# Altium PCB PCB1.PcbDoc (part 1 of 2)
Units mm, origin at the board's own origin, x right, y up, seen from the top; angles counter-clockwise.
Board outline 100 x 100 mm, 4 copper layers (Top Layer, Layer 1, Layer 2, Bottom Layer), stack 1.55 mm thick; 115 components, 62 nets, 404 pads, 430 vias.
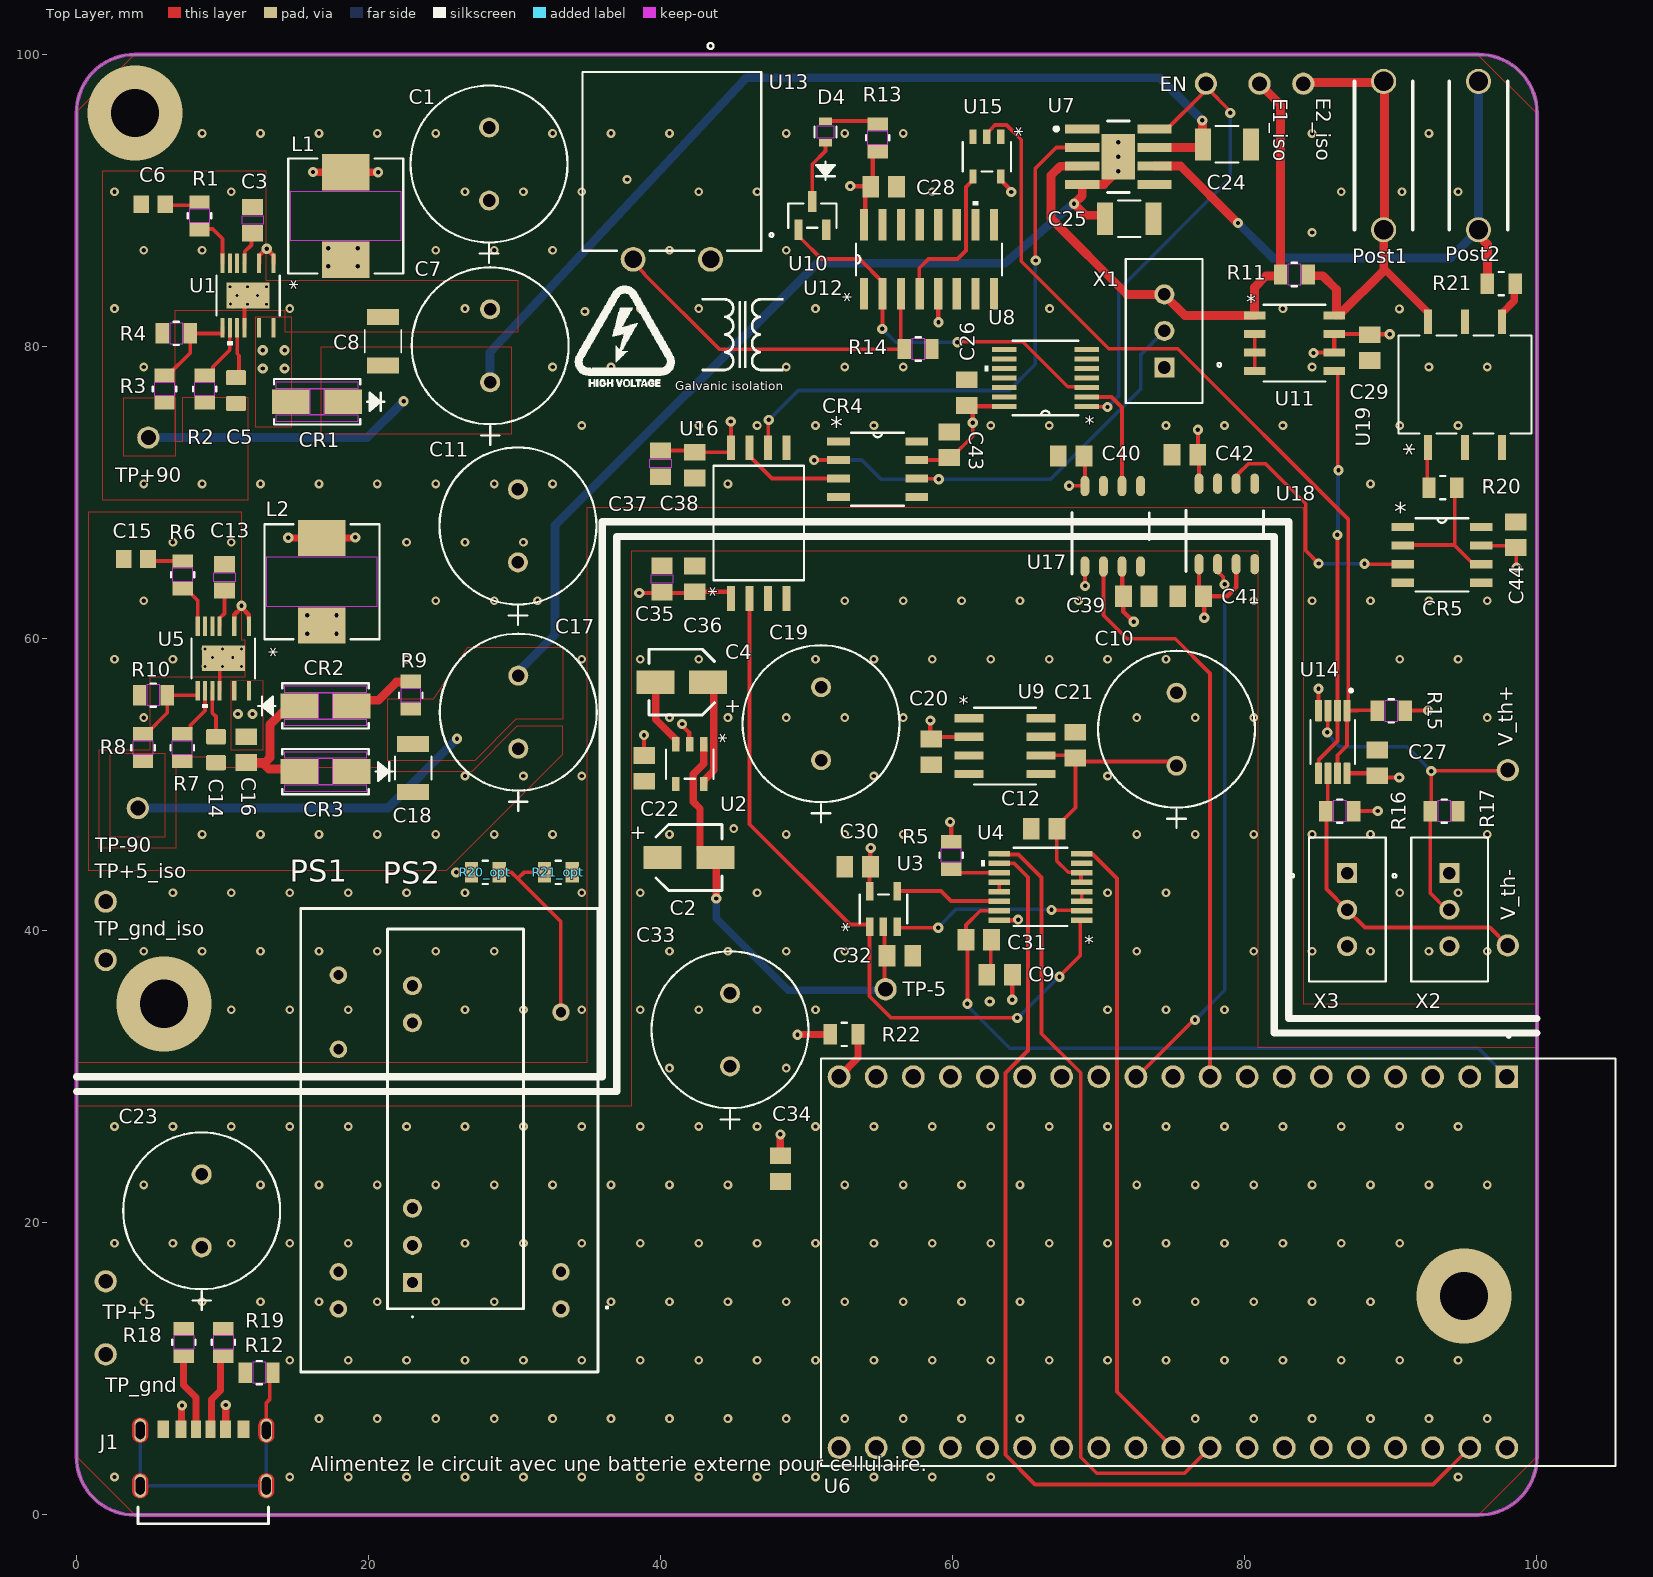
[diagram p0: Top Layer view]
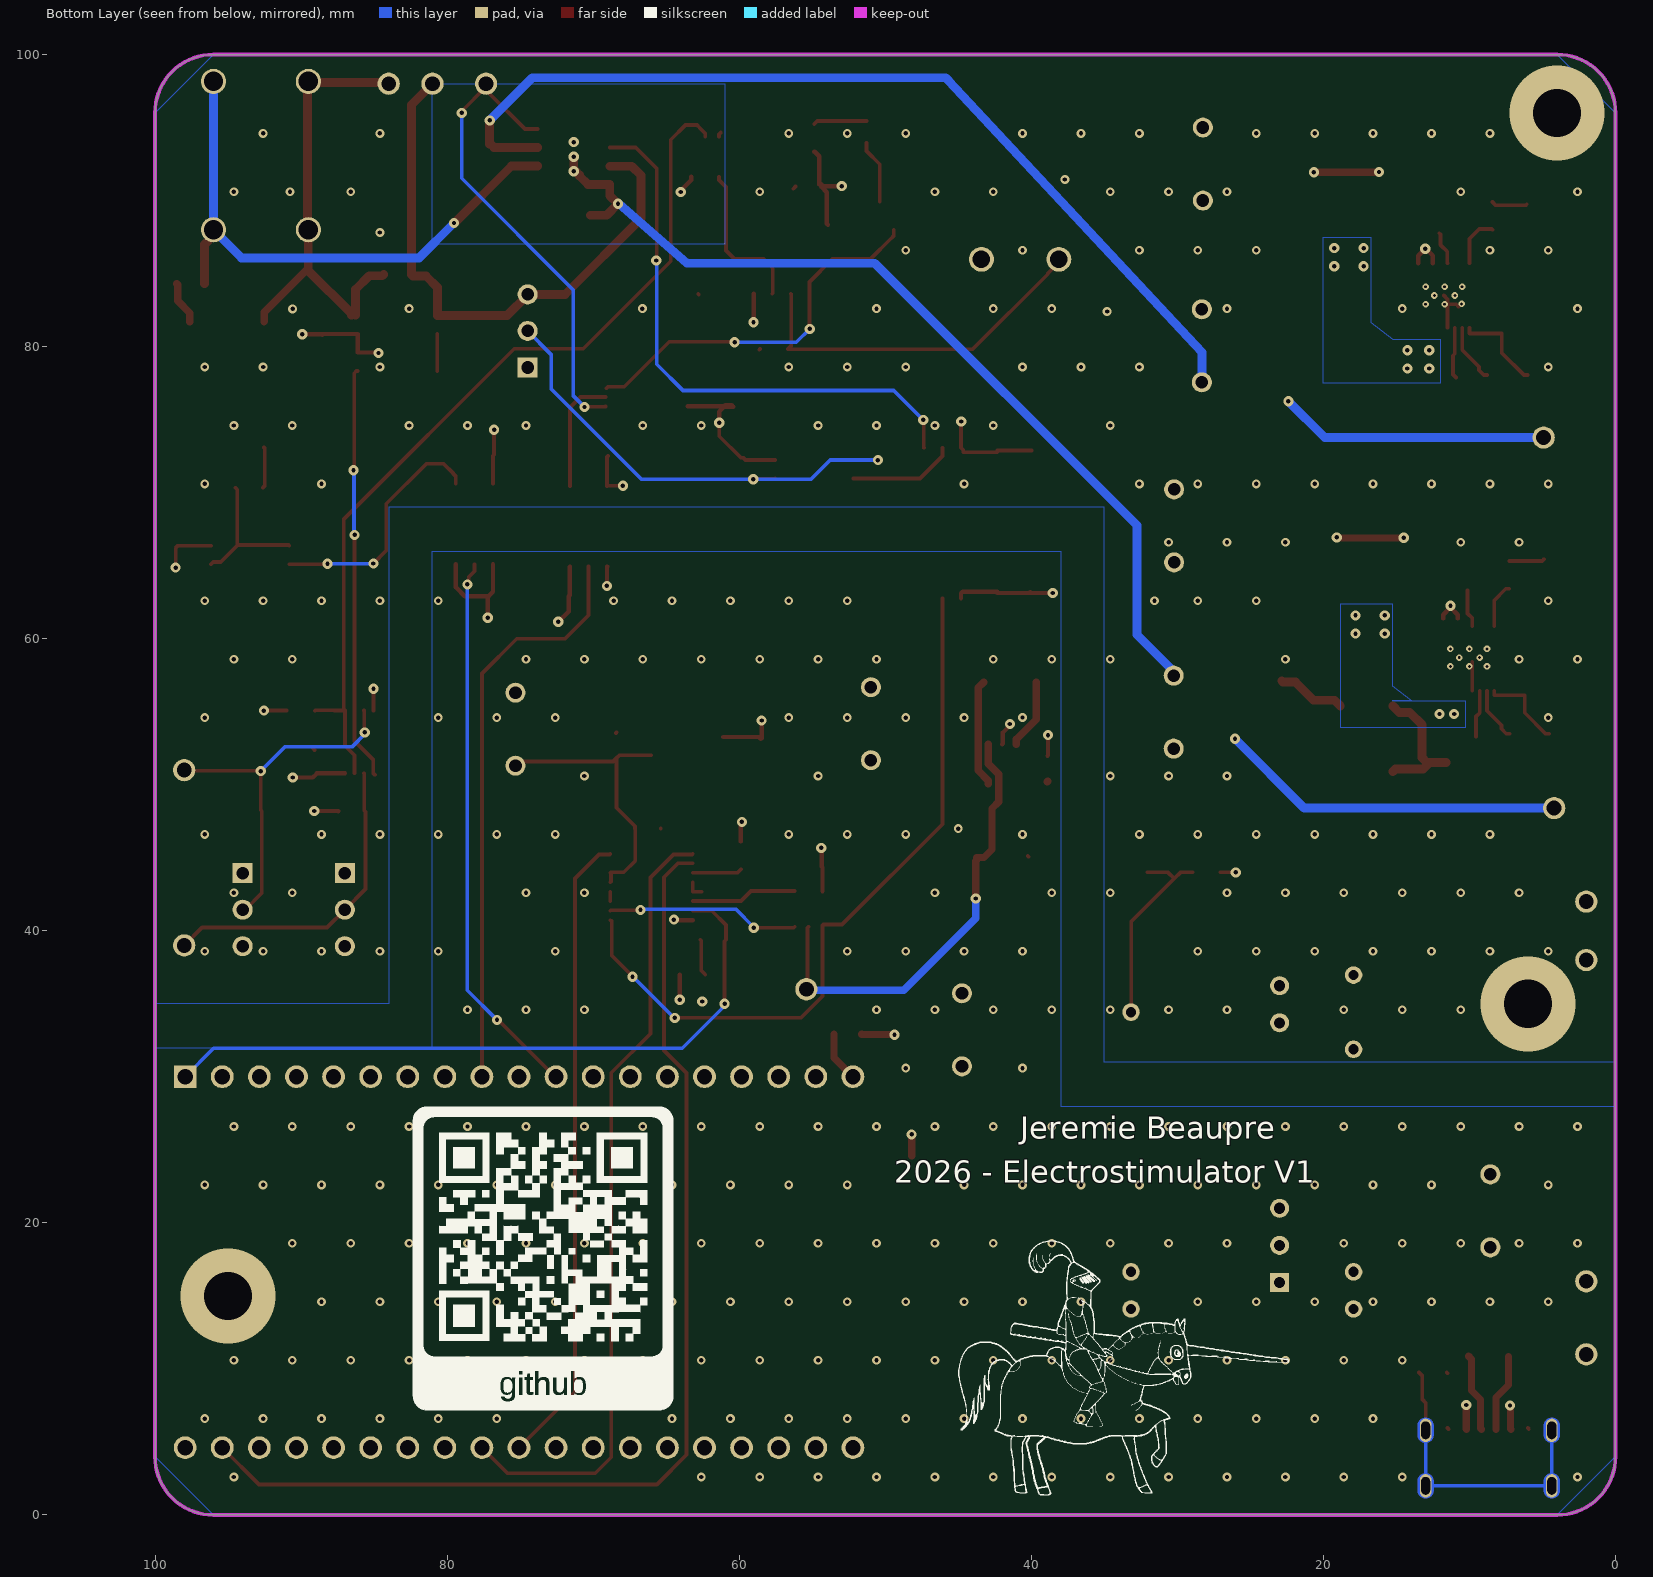
[diagram p1: Bottom Layer view, seen from below]
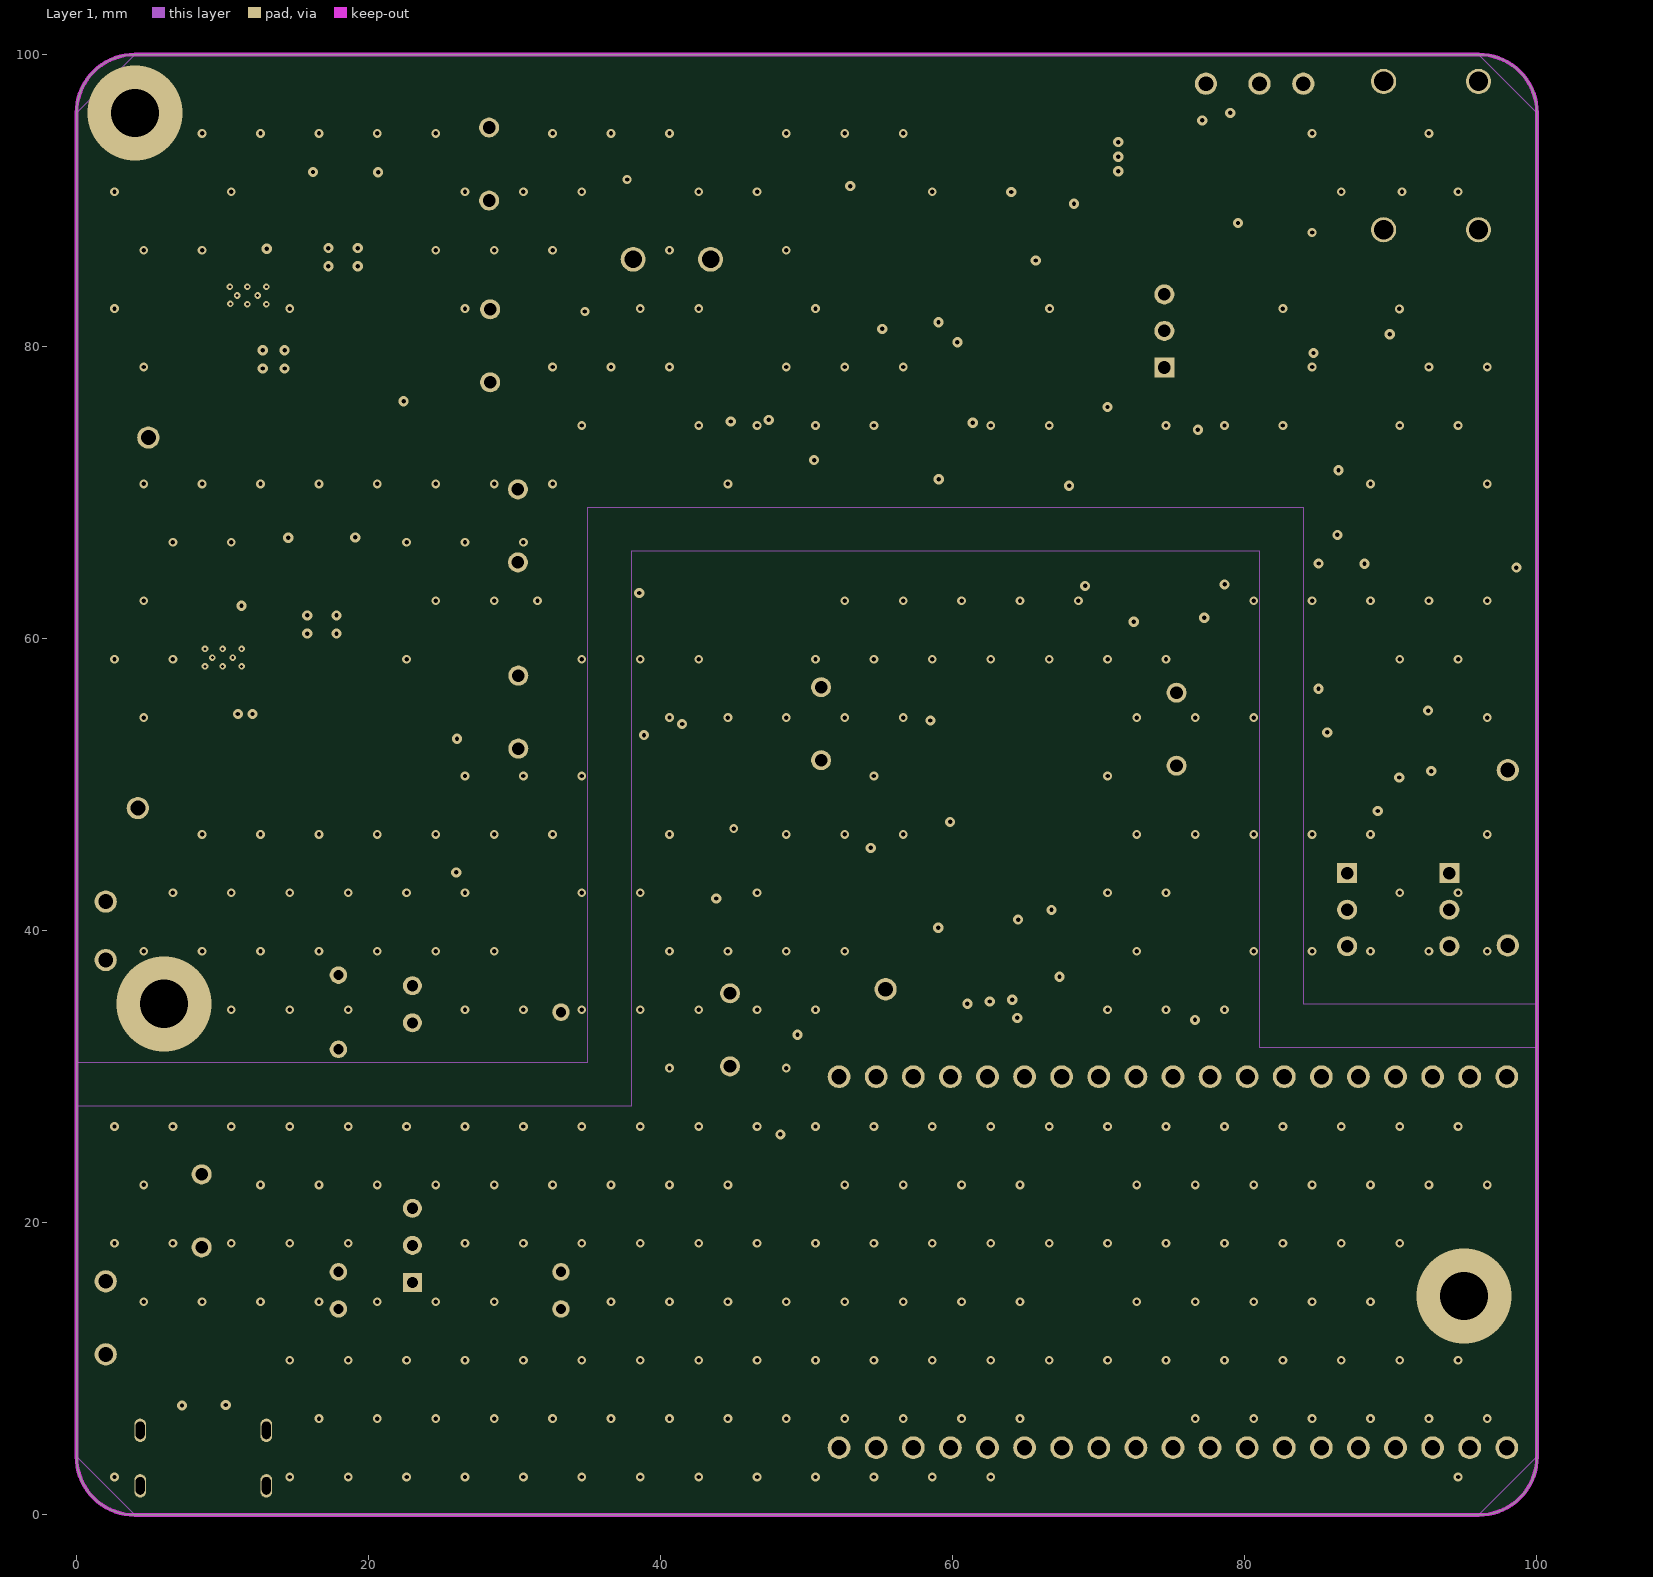
[diagram p2: Layer 1]
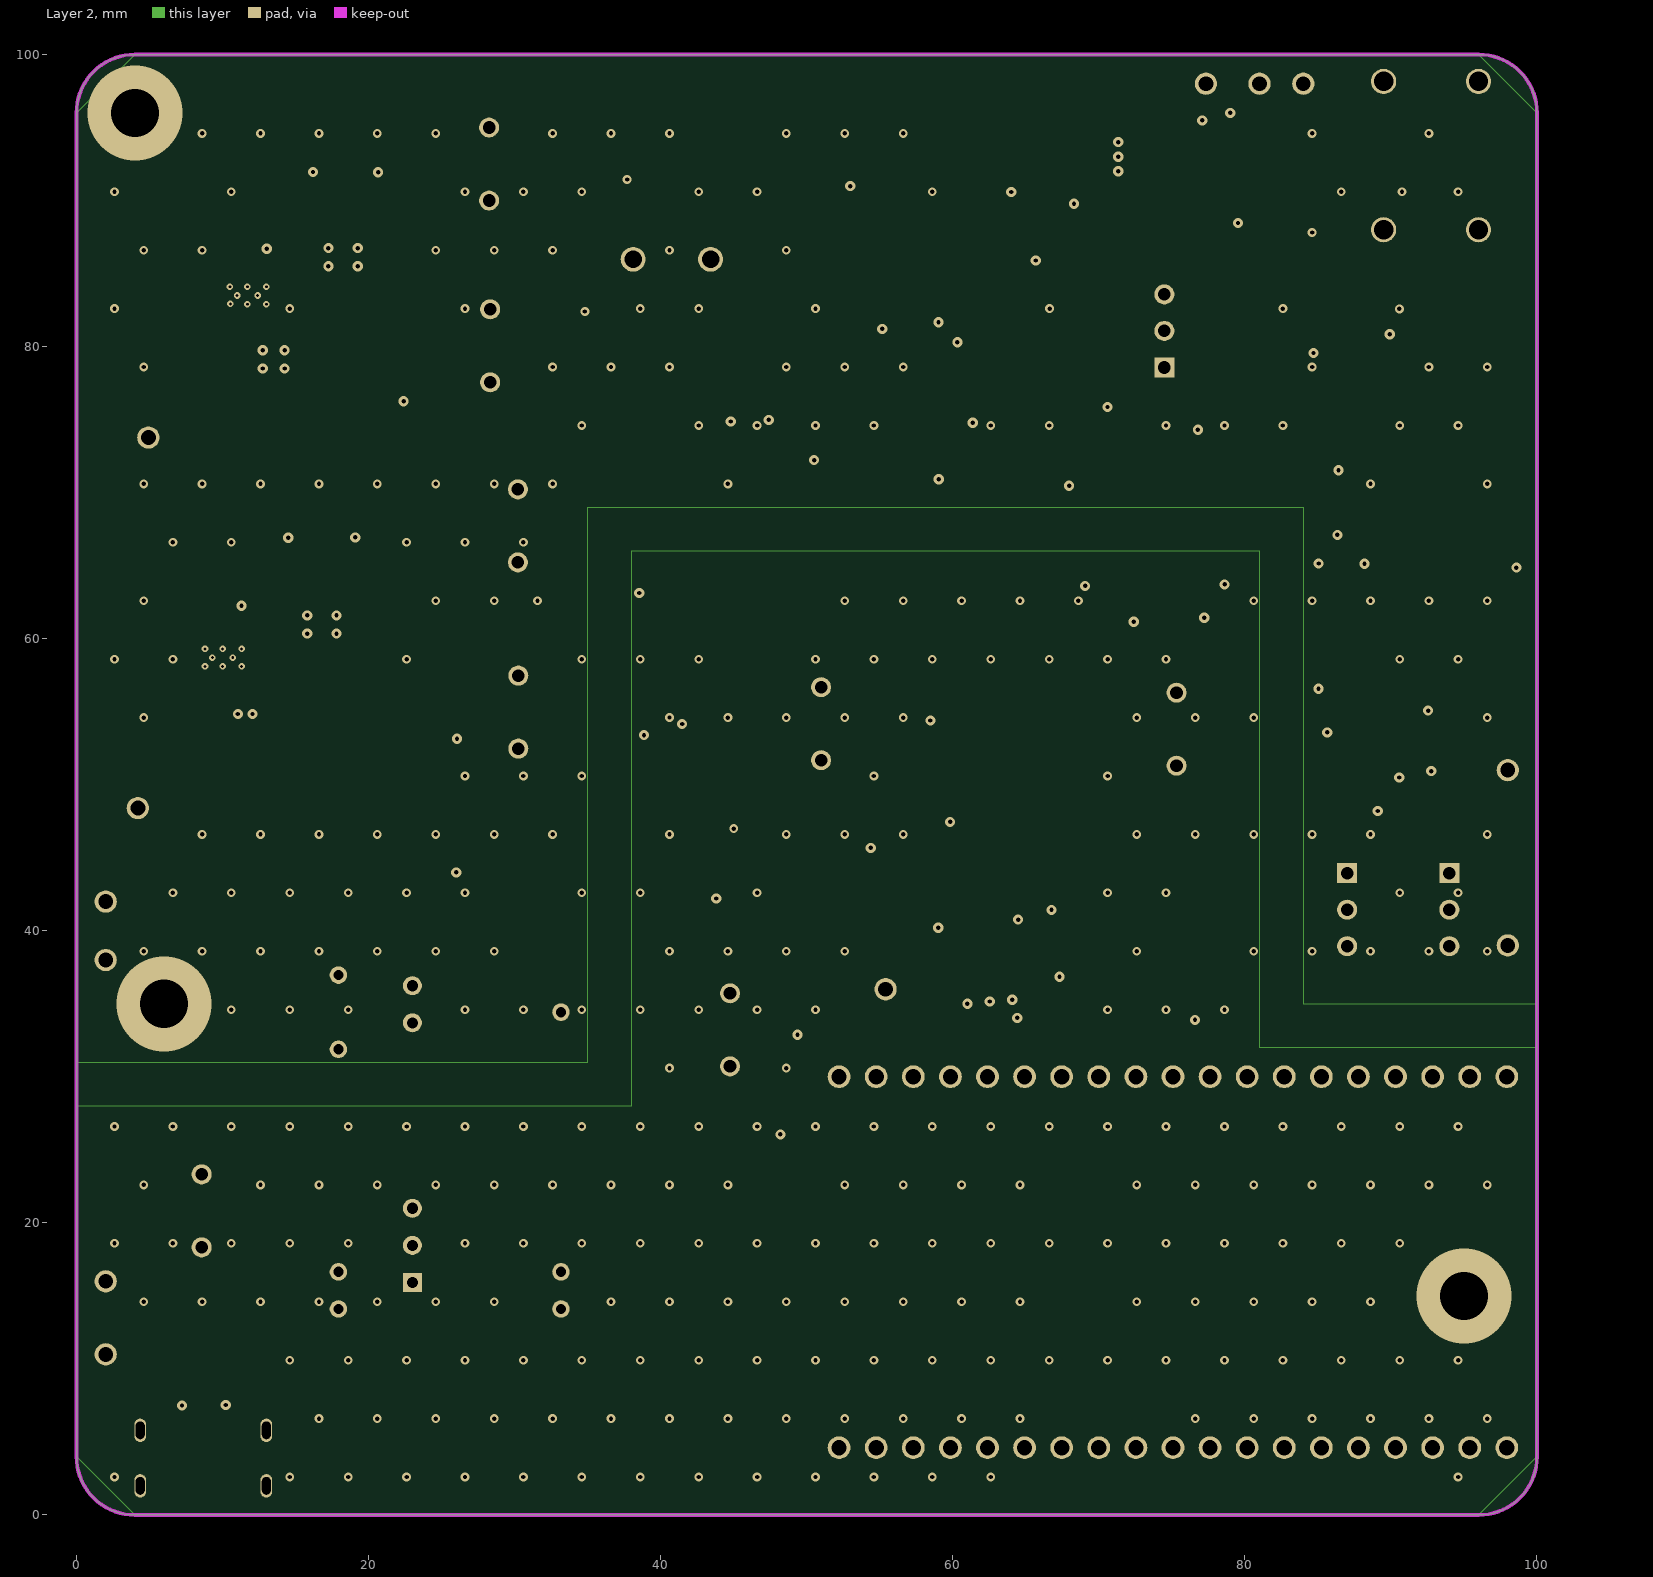
[diagram p3: Layer 2]
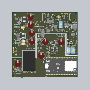
[diagram p5: 3D render of the assembled board from above, using the file's embedded part models]

## Layer stack, top to bottom
Top Solder: solder mask 0.0102, Solder Resist, Dk 3.5
Top Layer: signal copper 0.035
Dielectric 2: prepreg 0.19, PP-006, Dk 4.1
Layer 1: signal copper 0.035
Dielectric 1: core 1.03, Core-006, Dk 4.2
Layer 2: signal copper 0.035
Dielectric 3: prepreg 0.19, PP-006, Dk 4.1
Bottom Layer: signal copper 0.035
Bottom Solder: solder mask 0.0102, Solder Resist, Dk 3.5

## Board outline
0,4 0,96 cw(c4,96) 4,100 96,100 cw(c96,96) 100,96 100,4 cw(c96,4) 96,0 4,0 cw(c4,4)

## Design rules (kind name [scope] priority, off if disabled: settings)
Clearance HighVoltage [InNetClass('HighVoltage')] p1: gap=0.6 ignorepadtopadclearanceinfootprint=TRUE except(0.01: SMDPad-Region Region-Region; 0.152: Arc-Region Arc-Text Arc-Hole Track-Region Track-Text Track-Hole SMDPad-Text SMDPad-Hole THPad-Region THPad-Text THPad-Hole Via-Region Via-Text Via-Hole Fill-Region Fill-Text Fill-Hole Poly-Region Poly-Text Poly-Hole Region-Text Region-Hole Text-Text Text-Hole)
Clearance [All] p2: gap=0.2 ignorepadtopadclearanceinfootprint=TRUE except(0.01: SMDPad-Region Region-Region; 0.152: Track-Region)
HoleSize [All] p1: absolutevalues=TRUE maxlimit=6 minlimit=0.025 maxpercent=80.000 minpercent=20.000
MinimumSolderMaskSliver [All] p1: minsoldermaskwidth=0.1
PolygonConnect [All] p1: thpad.connectstyle=Relief thpad.reliefconductorwidth=0.254 thpad.reliefentries=4 thpad.polygonreliefangle="90 Angle" thpad.airgapwidth=0.254 smdpad.connectstyle=Relief smdpad.reliefconductorwidth=0.254 smdpad.reliefentries=4 smdpad.polygonreliefangle="90 Angle" smdpad.airgapwidth=0.254 via.connectstyle=Direct via.reliefconductorwidth=0.254 via.reliefentries=4 via.polygonreliefangle="90 Angle" via.airgapwidth=0.254
RoutingVias RoutingVias_small [All] p1: holewidth=0.3 width=0.7 viastyle="Through Hole" minholewidth=0.3 minwidth=0.7 maxholewidth=0.3 maxwidth=0.7
RoutingVias [All] p2: holewidth=0.711 width=6 viastyle="Through Hole" minholewidth=0.5 minwidth=0.7 maxholewidth=6 maxwidth=8
SolderMaskExpansion [All] p1: expansion=0.102 istentingtop=FALSE
SupplyNets "Schematic Supply Nets_25" [InNet('Electrode_charge_balancing')] p1: voltage=0.000
SupplyNets "Schematic Supply Nets_24" [InNet('Esp32_charge_balancing')] p2: voltage=0.000
SupplyNets "Schematic Supply Nets_23" [InNet('TRIM')] p3: voltage=0.000
SupplyNets "Schematic Supply Nets_22" [InNet('GND_iso')] p4: voltage=0.000
SupplyNets "Schematic Supply Nets_21" [InNet('+5_iso')] p5: voltage=0.000
SupplyNets "Schematic Supply Nets_20" [InNet('S1_iso-')] p6: voltage=0.000
SupplyNets "Schematic Supply Nets_19" [InNet('EN_OPA_iso')] p7: voltage=0.000
SupplyNets "Schematic Supply Nets_18" [InNet('S1_iso+')] p8: voltage=0.000
SupplyNets "Schematic Supply Nets_17" [InNet('S1')] p9: voltage=0.000
SupplyNets "Schematic Supply Nets_16" [InNet('-5')] p10: voltage=0.000
SupplyNets "Schematic Supply Nets_15" [InNet('Electrode -')] p11: voltage=0.000
SupplyNets "Schematic Supply Nets_14" [InNet('EN_OPA2')] p12: voltage=0.000
SupplyNets "Schematic Supply Nets_13" [InNet('+5')] p13: voltage=0.000
SupplyNets "Schematic Supply Nets_12" [InNet('+90')] p14: voltage=0.000
SupplyNets "Schematic Supply Nets_11" [InNet('DIN')] p15: voltage=0.000
SupplyNets "Schematic Supply Nets_10" [InNet('+2.5')] p16: voltage=0.000
SupplyNets "Schematic Supply Nets_9" [InNet('V_th+')] p17: voltage=0.000
SupplyNets "Schematic Supply Nets_8" [InNet('CS')] p18: voltage=0.000
SupplyNets "Schematic Supply Nets_7" [InNet('+3.3')] p19: voltage=0.000
SupplyNets "Schematic Supply Nets_6" [InNet('Electrode +')] p20: voltage=0.000
SupplyNets "Schematic Supply Nets_5" [InNet('GND')] p21: voltage=0.000
SupplyNets "Schematic Supply Nets_4" [InNet('V_th-')] p22: voltage=0.000
SupplyNets "Schematic Supply Nets_3" [InNet('INV')] p23: voltage=0.000
SupplyNets "Schematic Supply Nets_2" [InNet('EN_OPA')] p24: voltage=0.000
SupplyNets "Schematic Supply Nets_1" [InNet('CLK')] p25: voltage=0.000
SupplyNets "Schematic Supply Nets" [InNet('-90')] p26: voltage=0.000
Width Power [InNet('+5')] p1: maxlimit=0.6 minlimit=0.3 preferedwidth=0.3 midlayer1_maxwidth=0.3 midlayer2_maxwidth=0.3 bottomlayer_maxwidth=0.3 minimp=50.000000 maximp=50.000000 favimp=50.000000
Width [All] p2: maxlimit=0.6 minlimit=0.2 preferedwidth=0.254
28 further rules are at their usual default settings.

## Classes and differential pairs
component class Isolation: C35 C36 C37 C38 C39 C40 C41 C42 C43 C44 CR4 CR5 U16 U17 U18
net class HighVoltage: +90 -90 "Electrode +" "Electrode -" NetC16_1 NetC16_2 NetCR1_2 NetCR2_2 NetE2_iso_1
component class Current_check: C27 C28 C29 D4 E1_iso E2_iso Post1 Post2 R11 R13 R14 R15 R16 R17 R20 R21 U10 U11 U12 U13 U14 U15 U19 V_th+ V_th- X2 X3
component class Main: C1 C2 C3 C4 C5 C6 C7 C8 C9 C10 C11 C12 C13 C14 C15 C16 C17 C18 C19 C20 C21 C22 C23 C24 C25 C26 C30 C31 C32 C33 C34 CR1 CR2 CR3 EN J1 L1 L2 PS1 PS2 R1 R2 R3 R4 R5 R6 R7 R8 R9 R10 R12 R18 R19 R20_opt R21_opt R22 TP+5 TP+5_iso TP+90 TP-5 TP-90 TP_gnd TP_gnd_iso U1 U2 U3 U4 U5 U6 U7 U8 U9 X1

## Components (designator, comment, footprint, x,y, rotation, side; value= is the part's Value field where it differs from the comment)
C1 "10u" CAP_BX_10x20_RUB 28.25,90 r90 top
C2 "WCAP-ASLL_4X5.5" WCAP-ASLL_4X5.5(DXL) 41.936,45.02 r180 top
C3 "Capacitor" 0805_AVX 12.062,88.658 r90 top value=1u
C4 "WCAP-ASLL_4X5.5" WCAP-ASLL_4X5.5(DXL) 41.447,57.028 r0 top
C5 "Capacitor" CAPC2012X75N 10.922,76.992 r90 top value=2n
C6 "Capacitor" CC0805N_YAG 5.25,89.75 r0 top value=1n
C7 "10u" CAP_BX_10x20_RUB 28.324,77.556 r90 top
C8 "Capacitor" CAP_C3225X7R2E224K200AA 20.983,80.366 r270 top value=0.22u
C9 "Capacitor" CAPC2012X150N 63.2,37 r0 top value=0.1u
C10 "10u" CAP_BX_10x20_RUB 75.318,51.302 r90 top
C11 "10u" CAP_BX_10x20_RUB 30.225,65.223 r90 top
C12 "Capacitor" CAPC2012X150N 66.25,47 r0 top value=0.1u
C13 "Capacitor" 0805_AVX 10.13,64.207 r90 top value=1u
C14 "Capacitor" CAPC2012X75N 9.55,52.4 r90 top value=2n
C15 "Capacitor" CC0805N_YAG 4.068,65.449 r0 top value=1n
C16 "Capacitor" CAPC2012X150N 11.607,52.406 r90 top value=0.1u
C17 "10u" CAP_BX_10x20_RUB 30.25,52.473 r90 top
C18 "Capacitor" CAP_C3225X7R2E224K200AA 23.05,51.15 r90 top value=0.22u
C19 "10u" CAP_BX_10x20_RUB 50.98,51.679 r90 top
C20 "Capacitor" CAPC2012X150N 58.523,52.252 r90 top value=0.1u
C21 "Capacitor" CAPC2012X150N 68.397,52.711 r270 top value=0.1u
C22 "Capacitor" CAPC2012X150N 38.887,51.118 r270 top value=0.1u
C23 "10u" CAP_BX_10x20_RUB 8.571,18.325 r90 top
C24 "Capacitor" CAP_C3225X7R2E224K200AA 78.77,93.849 r180 top value=0.22u
C25 "Capacitor" CAP_C3225X7R2E224K200AA 72.082,88.75 r0 top value=0.22u
C26 "Capacitor" CAPC2012X150N 60.968,76.856 r90 top value=0.1u
C27 "Capacitor" CAPC2012X150N 89.074,51.498 r270 top value=0.1u
C28 "Capacitor" CAPC2012X150N 55.262,90.958 r180 top value=0.1u
C29 "Capacitor" CAPC2012X150N 88.558,79.925 r90 top value=0.1u
C30 "Capacitor" CAPC2012X150N 53.48,44.4 r0 top value=0.1u
C31 "Capacitor" CAPC2012X150N 61.779,39.383 r180 top value=0.1u
C32 "Capacitor" CAPC2012X150N 56.38,38.3 r180 top value=0.1u
C33 "10u" CAP_BX_10x20_RUB 44.748,30.721 r90 top
C34 "Capacitor" CAPC2012X150N 48.203,23.716 r90 top value=0.1u
C35 "Capacitor" 0805_AVX 40.085,64.089 r270 top value=1u
C36 "Capacitor" CAPC2012X150N 42.332,64.089 r90 top value=0.1u
C37 "Capacitor" 0805_AVX 39.985,71.988 r270 top value=1u
C38 "Capacitor" CAPC2012X150N 42.332,71.892 r90 top value=0.1u
C39 "Capacitor" CAPC2012X150N 72.559,62.909 r180 top value=0.1u
C40 "Capacitor" CAPC2012X150N 68.099,72.51 r0 top value=0.1u
C41 "Capacitor" CAPC2012X150N 76.28,62.909 r0 top value=0.1u
C42 "Capacitor" CAPC2012X150N 75.888,72.599 r0 top value=0.1u
C43 "Capacitor" CAPC2012X150N 59.741,73.278 r270 top value=0.1u
C44 "Capacitor" CAPC2012X150N 98.556,67.115 r270 top value=0.1u
CR1 "SK220ATR" DIODE_SK220ATR_SMC-M 16.473,76.224 r180 top
CR2 "SK220ATR" DIODE_SK220ATR_SMC-M 17.05,55.4 r0 top
CR3 "SK220ATR" DIODE_SK220ATR_SMC-M 17.05,50.9 r180 top
CR4 "TS461CDT" SO-8_STM 54.856,71.599 r0 top
CR5 "TS461CDT" SO-8_STM 93.492,65.738 r0 top
D4 "SML-M13UTT86" LED_SML-M13DT_ROM 51.281,94.694 r90 top
E1_iso "Testpoint_1" Testpoint1 81,98 r0 top
E2_iso "Testpoint_1" Testpoint1 84,98 r0 top
EN "Testpoint_1" Testpoint1 77.332,98 r0 top
J1 "USB4125-GF-A_REVA2" GCT_USB4125-GF-A_REVA2 8.68,2.8 r0 top
L1 "Inductor" DR73 18.44,88.946 r270 top value=10u
L2 "Inductor" DR73 16.8,63.9 r270 top value=10u
Post1 "J110-ND" J110-ND 89.5,88 r90 top
Post2 "J110-ND" J110-ND 96,88 r90 top
PS1 "JHM1005S05" JHM1005S05 33.173,14.108 r270 top
PS2 "IMM0505S05" IMM0505S05 23,15.92 r90 top
R1 "Resistor" RESISTOR_0805-M 8.422,88.946 r270 top value=84.5K
R2 "Resistor" RESISTOR_0805-M 8.774,77.097 r90 top value=107K
R3 "Resistor" RESISTOR_0805-M 6.028,77.097 r270 top value=1MEG
R4 "Resistor" RESISTOR_0805-M 6.829,80.903 r180 top value=18.1K
R5 "Resistor" RESISTOR_0805-M 59.884,45.16 r270 top value=10k
R6 "Resistor" RESISTOR_0805-M 7.267,64.368 r270 top value=84.5K
R7 "Resistor" RESISTOR_0805-M 7.236,52.546 r90 top value=107K
R8 "1MEG" RESISTOR_0805-M 4.551,52.546 r90 top
R9 "Resistor" RESISTOR_0805-M 22.885,56.135 r270 top value=20
R10 "Resistor" RESISTOR_0805-M 5.267,56.135 r180 top value=8.96k
R11 "Resistor" RESISTOR_0805-M 83.391,84.939 r0 top value=1
R12 "Resistor" RESISTOR_0805-M 12.5,9.75 r180 top value=1MEG
R13 "Resistor" RESISTOR_0805-M 54.856,94.288 r270 top value=350
R14 "Resistor" RESISTOR_0805-M 57.625,79.834 r0 top value=10K
R15 "Resistor" RESISTOR_0805-M 90.022,55.059 r0 top value=10K
R16 "Resistor" RESISTOR_0805-M 86.5,48.195 r0 top value=1K
R17 "Resistor" RESISTOR_0805-M 93.64,48.195 r180 top value=1K
R18 "Resistor" RESISTOR_0805-M 7.355,11.815 r270 top value=5.1k
R19 "Resistor" RESISTOR_0805-M 10.058,11.815 r270 top value=5.1k
R20 "Resistor" Resistor_0805-M 93.559,70.345 r0 top value=680
R20_opt "Resistor" Resistor_0805-M 28,44 r0 top value=2k
R21 "Resistor" Resistor_0805-M 97.558,84.313 r0 top value=1
R21_opt "Resistor" Resistor_0805-M 33,44 r0 top value=2k
R22 "Resistor" Resistor_0805-M 52.559,32.91 r180 top value=0
TP+5 "Testpoint_1" Testpoint1 2,16 r90 top
TP+5_iso "Testpoint_1" Testpoint1 2,42 r90 top
TP+90 "Testpoint_1" Testpoint1 4.921,73.772 r0 top
TP-5 "Testpoint_1" Testpoint1 55.4,36 r270 top
TP-90 "Testpoint_1" Testpoint1 4.2,48.4 r90 top
TP_gnd "Testpoint_1" Testpoint1 2,11 r90 top
TP_gnd_iso "Testpoint_1" Testpoint1 2,38 r90 top
U1 "LT8365HMSE#PBF" 05-08-1871_ADI 11.75,83.5 r270 top
U2 "MAX870EUK+T" 21-0057F_MXM 41.988,51.415 r270 top
U3 "AD8628ARTZ-REEL7" RJ_5_ADI 55.25,41.5 r90 top
U4 "AD5542ABRUZ" RU_16_ADI 66,43 r180 top
U5 "LT8365HMSE#PBF" 05-08-1871_ADI 10.05,58.65 r270 top
U6 "ESP32-DEVKITC-32UE" ESPRESSIF_ESP32-DEVKITC-32UE 75.075,17.308 r270 top
U7 "OPA462IDDA" DDA0008J-IPC_A 71.332,93 r0 top
U8 "SN74HC02PWR" PW14 66.34,77.853 r180 top
U9 "ADR421ARZ" R_8_ADI 63.578,52.646 r0 top
U10 "2N7002KT1G" SOT-23_ONS 50.38,88.965 r0 top
U11 "INA240A1DR" D8_TEX 83.391,80.231 r0 top
U12 "CD4043BDR" D16 58.368,85.979 r90 top
U13 "GPTS203211B" SWITCH_03211B 43.414,85.979 r270 top
U14 "TLV1702AIDGKR" SOP65P490X110-8N 86.015,52.928 r270 top
U15 "SN74AHC1G04DBVR" DBV5 62.332,93 r270 top
U16 "AMC1350QDWVRQ1" AMC1350QDWVRQ1_TEX 46.717,67.92 r90 top
U17 "ISO7710FDR" D0008B_N 70.95,67.697 r90 top
U18 "ISO7710FDR" D0008B_N 78.763,67.861 r90 top
U19 "AQV217AZ" DIP-6_SMD_PAN 95.073,77.399 r90 top
V_th+ "Testpoint_1" Testpoint1 98,51 r270 top
V_th- "Testpoint_1" Testpoint1 98,39 r270 top
X1 "PV36W102C01B00" POT_PV36W_MUR 74.485,78.572 r90 top
X2 "PV36W102C01B00" POT_PV36W_MUR 94,43.945 r270 top
X3 "PV36W102C01B00" POT_PV36W_MUR 87,43.945 r270 top

## Footprints (in the part's own frame and the unit in brackets; to place one, negate y for a bottom-side part, rotate by r counter-clockwise, add the part's x,y. Pads: shape width x height; smd on the part's side, far side on the other; paste and mask are expansions set on the pad)
05-08-1871_ADI [mil]
  rect 52.5x11 smd paste+0 mask+0: 1(-87.25,68.9) 3(-87.25,29.53) 5(-87.25,-9.84) 6(-87.25,-29.53) 7(-87.25,-49.21) 8(-87.25,-68.9) 9(87.25,-68.9) 10(87.25,-49.21) 11(87.25,-29.53) 12(87.25,-9.84) 14(87.25,29.53) 16(87.25,68.9)
  rect 69x116 smd paste-57.5 mask+0: 17(0,0)
  silkscreen extent -54,-86 134,86, body extent -99,-81 99,81, height 43
21-0057F_MXM [mil]
  rect 38.5x20 smd paste+0 mask+0: 1(-53.75,37.4) 2(-53.75,0) 3(-53.75,-37.4) 4(53.75,-37.4) 5(53.75,37.4)
  silkscreen extent -40,-64 40,64, body extent -59,-59 59,59, height 57
0805_AVX [mil]
  rect 44x57 smd paste+0 mask+0: 1(-35.5,0) 2(35.5,0)
  Top Layer keep-out region: -11.5,-28.5 -11.5,28.5 11.5,28.5 11.5,-28.5
  body extent -44,-29 44,29, height 37
AMC1350QDWVRQ1_TEX [mil]
  rect 67x22 smd paste+0 mask+0: 1(-203,75) 2(-203,25) 3(-203,-25) 4(-203,-75) 5(203,-75) 6(203,-25) 7(203,25) 8(203,75)
  silkscreen extent -154,-122 154,122, body extent -223,-117 223,117, height 110
CAP_BX_10x20_RUB [mil]
  round 54 hole 34 paste-99999 mask+0: 1(0,0) 2(196.85,0)
  silkscreen extent -168,-212 310,212, body extent -108,-206 306,206, height 867
CAP_C3225X7R2E224K200AA [mm]
  rect 1.1x2.2 smd: 1(-1.65,0) 2(1.65,0)
  silkscreen extent -0.78,-1.25 0.78,1.25, body extent -1.6,-1.25 1.6,1.25, height 2.2
CAPC2012X75N [mm]
  rrect25% 1.05x1.38 smd: 1(-0.888,0) 2(0.888,0)
CAPC2012X150N [mm]
  rect 1.15x1.47 smd: 1(-0.88,0) 2(0.88,0)
  body extent -1,-0.63 1,0.63, height 1.5
CC0805N_YAG [mil]
  rect 42x48 smd paste+0 mask+0: 1(-32.5,0) 2(32.5,0)
  body extent -39,-24 39,24, height 28
D8_TEX [mm]
  rect 1.455x0.558 smd paste+0 mask+0: 1(-2.721,1.905) 2(-2.721,0.635) 3(-2.721,-0.635) 4(-2.721,-1.905) 5(2.721,-1.905) 6(2.721,-0.635) 7(2.721,0.635) 8(2.721,1.905)
  silkscreen extent -2.12,-2.63 2.12,2.63, body extent -3.1,-2.5 3.1,2.5, height 1.76
D0008B_N [mil]
  oval 55x23.62 smd paste+0 mask+2: 1(-108.5,75) 2(-108.5,25) 3(-108.5,-25) 4(-108.5,-75) 5(108.5,-75) 6(108.5,-25) 7(108.5,25) 8(108.5,75)
  silkscreen extent -129,-98 37,110
D16 [mil]
  rect 86x22 smd paste-43 mask-43: 1(-93,175) 2(-93,125) 3(-93,75) 4(-93,25) 5(-93,-25) 6(-93,-75) 7(-93,-125) 8(-93,-175) 9(93,-175) 10(93,-125) 11(93,-75) 12(93,-25) 13(93,25) 14(93,75) 15(93,125) 16(93,175)
  silkscreen extent -43,-197 156,197, body extent -122,-197 122,197, height 69
DBV5 [mil]
  rect 38.28x20 smd paste+0 mask+0: 1(-53.64,37.4) 2(-53.64,0) 3(-53.64,-37.4) 4(53.64,-37.4) 5(53.64,37.4)
  silkscreen extent -40,-65 40,65, body extent -59,-60 59,60, height 57
DDA0008J-IPC_A [mm]
  rect 2.353x0.622 smd paste+0 mask+0: 1(-2.477,1.905) 2(-2.477,0.635) 3(-2.477,-0.635) 4(-2.477,-1.905) 5(2.477,-1.905) 6(2.477,-0.635) 7(2.477,0.635) 8(2.477,1.905)
  rect 2.3x3.1 smd paste-1.537 mask+0: 9(0,0)
  silkscreen extent -4.37,-2.45 0.75,2.45
DIODE_SK220ATR_SMC-M [mil]
  rect 101x67 smd paste+0 mask+0: 1(-71,0) 2(71,0)
  Top Layer keep-out region: -18.5,-35.5 -18.5,35.5 18.5,35.5 18.5,-35.5
  Top Layer keep-out region: -109.5,35.5 -109.5,54 109.5,54 109.5,35.5
  Top Layer keep-out region: -109.5,-54 -109.5,-35.5 109.5,-35.5 109.5,-54
  silkscreen extent -182,-61 117,61, body extent -111,-56 111,56, height 118
DIP-6_SMD_PAN [mil]
  rect 67x21 smd paste+0 mask+0: 1(-169.5,100) 2(-169.5,0) 3(-169.5,-100) 4(169.5,-100) 5(169.5,0) 6(169.5,100)
  silkscreen extent -132,-179 132,179, body extent -189,-174 189,174, height 150
DR73 [mil]
  rect 98x128 smd paste+0 mask+0: 1(-118,0) 2(118,0)
  Top Layer keep-out region: -67,-148 -67,148 67,148 67,-148
  silkscreen extent -155,-155 155,155, body extent -150,-150 150,150, height 140
ESPRESSIF_ESP32-DEVKITC-32UE [mm]
  rect 1.56x1.56 / inner round 1.56 / far side rect 1.56x1.56 hole 1.04: 1(-12.7,22.86)
  round 1.56 hole 1.04: 2(-12.7,20.32) 3(-12.7,17.78) 4(-12.7,15.24) 5(-12.7,12.7) 6(-12.7,10.16) 7(-12.7,7.62) 8(-12.7,5.08) 9(-12.7,2.54) 10(-12.7,0) 11(-12.7,-2.54) 12(-12.7,-5.08) 13(-12.7,-7.62) 14(-12.7,-10.16) 15(-12.7,-12.7) 16(-12.7,-15.24) 17(-12.7,-17.78) 18(-12.7,-20.32) 19(-12.7,-22.86) 20(12.7,22.86) 21(12.7,20.32) 22(12.7,17.78) 23(12.7,15.24) 24(12.7,12.7) 25(12.7,10.16) 26(12.7,7.62) 27(12.7,5.08) 28(12.7,2.54) 29(12.7,0) 30(12.7,-2.54) 31(12.7,-5.08) 32(12.7,-7.62) 33(12.7,-10.16) 34(12.7,-12.7) 35(12.7,-15.24) 36(12.7,-17.78) 37(12.7,-20.32) 38(12.7,-22.86)
  silkscreen extent -15.6,-24.1 13.95,30.3, body extent -13.95,-24.62 13.95,24.13, height 7.85
GCT_USB4125-GF-A_REVA2 [mm]
  rect 0.7x1.2 smd: A5(-0.5,3.08) B5(0.5,3.08)
  rect 0.76x1.2 smd: A9(1.52,3.08) B9(-1.52,3.08)
  rect 0.8x1.2 smd: A12(2.75,3.08) B12(-2.75,3.08)
  oval 0.8x1.6 hole 0.6 slot 1.2 at 90 deg mask+0: S1(-4.32,3) S2(4.32,3) S3(-4.32,-0.8) S4(4.32,-0.8)
  Top Layer region: 4.349,0.049 4.377,0.047 4.406,0.043 4.434,0.038 4.462,0.031 4.49,0.023 4.517,0.013 4.544,0.002 4.57,-0.01 4.595,-0.024 4.62,-0.039 4.643,-0.055 4.666,-0.073 4.688,-0.091 4.709,-0.111 4.729,-0.132 4.747,-0.154 4.765,-0.177 4.781,-0.2 4.796,-0.225 4.81,-0.25 4.822,-0.276 4.833,-0.303 4.843,-0.33 4.851,-0.358 4.858,-0.386 4.863,-0.414 4.867,-0.443 4.869,-0.471 4.87,-0.5 4.87,-1.1 4.869,-1.129 4.867,-1.157 4.863,-1.186 4.858,-1.214 4.851,-1.242 4.843,-1.27 4.833,-1.297 4.822,-1.324 4.81,-1.35 4.796,-1.375 4.781,-1.4 4.765,-1.423 4.747,-1.446 4.729,-1.468 4.709,-1.489 4.688,-1.509 4.666,-1.527 4.643,-1.545 4.62,-1.561 4.595,-1.576 4.57,-1.59 4.544,-1.602 4.517,-1.613 4.49,-1.623 4.462,-1.631 4.434,-1.638 4.406,-1.643 4.377,-1.647 4.349,-1.649 4.32,-1.65 4.291,-1.649 4.263,-1.647 4.234,-1.643 4.206,-1.638 4.178,-1.631 4.15,-1.623 4.123,-1.613 4.096,-1.602 4.07,-1.59 4.045,-1.576 4.02,-1.561 3.997,-1.545 3.974,-1.527 3.952,-1.509 3.931,-1.489 3.911,-1.468 3.893,-1.446 3.875,-1.423 3.859,-1.4 3.844,-1.375 3.83,-1.35 3.818,-1.324 3.807,-1.297 3.797,-1.27 3.789,-1.242 3.782,-1.214 3.777,-1.186 3.773,-1.157 3.771,-1.129 3.77,-1.1 3.77,-0.5 3.771,-0.471 3.773,-0.443 3.777,-0.414 3.782,-0.386 3.789,-0.358 3.797,-0.33 3.807,-0.303 3.818,-0.276 3.83,-0.25 3.844,-0.225 3.859,-0.2 3.875,-0.177 3.893,-0.154 3.911,-0.132 3.931,-0.111 3.952,-0.091 3.974,-0.073 3.997,-0.055 4.02,-0.039 4.045,-0.024 4.07,-0.01 4.096,0.002 4.123,0.013 4.15,0.023 4.178,0.031 4.206,0.038 4.234,0.043 4.263,0.047 4.291,0.049 4.32,0.05
  Top Layer region: 4.349,3.849 4.377,3.847 4.406,3.843 4.434,3.838 4.462,3.831 4.49,3.823 4.517,3.813 4.544,3.802 4.57,3.79 4.595,3.776 4.62,3.761 4.643,3.745 4.666,3.727 4.688,3.709 4.709,3.689 4.729,3.668 4.747,3.646 4.765,3.623 4.781,3.6 4.796,3.575 4.81,3.55 4.822,3.524 4.833,3.497 4.843,3.47 4.851,3.442 4.858,3.414 4.863,3.386 4.867,3.357 4.869,3.329 4.87,3.3 4.87,2.7 4.869,2.671 4.867,2.643 4.863,2.614 4.858,2.586 4.851,2.558 4.843,2.53 4.833,2.503 4.822,2.476 4.81,2.45 4.796,2.425 4.781,2.4 4.765,2.377 4.747,2.354 4.729,2.332 4.709,2.311 4.688,2.291 4.666,2.273 4.643,2.255 4.62,2.239 4.595,2.224 4.57,2.21 4.544,2.198 4.517,2.187 4.49,2.177 4.462,2.169 4.434,2.162 4.406,2.157 4.377,2.153 4.349,2.151 4.32,2.15 4.291,2.151 4.263,2.153 4.234,2.157 4.206,2.162 4.178,2.169 4.15,2.177 4.123,2.187 4.096,2.198 4.07,2.21 4.045,2.224 4.02,2.239 3.997,2.255 3.974,2.273 3.952,2.291 3.931,2.311 3.911,2.332 3.893,2.354 3.875,2.377 3.859,2.4 3.844,2.425 3.83,2.45 3.818,2.476 3.807,2.503 3.797,2.53 3.789,2.558 3.782,2.586 3.777,2.614 3.773,2.643 3.771,2.671 3.77,2.7 3.77,3.3 3.771,3.329 3.773,3.357 3.777,3.386 3.782,3.414 3.789,3.442 3.797,3.47 3.807,3.497 3.818,3.524 3.83,3.55 3.844,3.575 3.859,3.6 3.875,3.623 3.893,3.646 3.911,3.668 3.931,3.689 3.952,3.709 3.974,3.727 3.997,3.745 4.02,3.761 4.045,3.776 4.07,3.79 4.096,3.802 4.123,3.813 4.15,3.823 4.178,3.831 4.206,3.838 4.234,3.843 4.263,3.847 4.291,3.849 4.32,3.85
  Top Layer region: -4.291,3.849 -4.263,3.847 -4.234,3.843 -4.206,3.838 -4.178,3.831 -4.15,3.823 -4.123,3.813 -4.096,3.802 -4.07,3.79 -4.045,3.776 -4.02,3.761 -3.997,3.745 -3.974,3.727 -3.952,3.709 -3.931,3.689 -3.911,3.668 -3.893,3.646 -3.875,3.623 -3.859,3.6 -3.844,3.575 -3.83,3.55 -3.818,3.524 -3.807,3.497 -3.797,3.47 -3.789,3.442 -3.782,3.414 -3.777,3.386 -3.773,3.357 -3.771,3.329 -3.77,3.3 -3.77,2.7 -3.771,2.671 -3.773,2.643 -3.777,2.614 -3.782,2.586 -3.789,2.558 -3.797,2.53 -3.807,2.503 -3.818,2.476 -3.83,2.45 -3.844,2.425 -3.859,2.4 -3.875,2.377 -3.893,2.354 -3.911,2.332 -3.931,2.311 -3.952,2.291 -3.974,2.273 -3.997,2.255 -4.02,2.239 -4.045,2.224 -4.07,2.21 -4.096,2.198 -4.123,2.187 -4.15,2.177 -4.178,2.169 -4.206,2.162 -4.234,2.157 -4.263,2.153 -4.291,2.151 -4.32,2.15 -4.349,2.151 -4.377,2.153 -4.406,2.157 -4.434,2.162 -4.462,2.169 -4.49,2.177 -4.517,2.187 -4.544,2.198 -4.57,2.21 -4.595,2.224 -4.62,2.239 -4.643,2.255 -4.666,2.273 -4.688,2.291 -4.709,2.311 -4.729,2.332 -4.747,2.354 -4.765,2.377 -4.781,2.4 -4.796,2.425 -4.81,2.45 -4.822,2.476 -4.833,2.503 -4.843,2.53 -4.851,2.558 -4.858,2.586 -4.863,2.614 -4.867,2.643 -4.869,2.671 -4.87,2.7 -4.87,3.3 -4.869,3.329 -4.867,3.357 -4.863,3.386 -4.858,3.414 -4.851,3.442 -4.843,3.47 -4.833,3.497 -4.822,3.524 -4.81,3.55 -4.796,3.575 -4.781,3.6 -4.765,3.623 -4.747,3.646 -4.729,3.668 -4.709,3.689 -4.688,3.709 -4.666,3.727 -4.643,3.745 -4.62,3.761 -4.595,3.776 -4.57,3.79 -4.544,3.802 -4.517,3.813 -4.49,3.823 -4.462,3.831 -4.434,3.838 -4.406,3.843 -4.377,3.847 -4.349,3.849 -4.32,3.85
  Top Layer region: -4.291,0.049 -4.263,0.047 -4.234,0.043 -4.206,0.038 -4.178,0.031 -4.15,0.023 -4.123,0.013 -4.096,0.002 -4.07,-0.01 -4.045,-0.024 -4.02,-0.039 -3.997,-0.055 -3.974,-0.073 -3.952,-0.091 -3.931,-0.111 -3.911,-0.132 -3.893,-0.154 -3.875,-0.177 -3.859,-0.2 -3.844,-0.225 -3.83,-0.25 -3.818,-0.276 -3.807,-0.303 -3.797,-0.33 -3.789,-0.358 -3.782,-0.386 -3.777,-0.414 -3.773,-0.443 -3.771,-0.471 -3.77,-0.5 -3.77,-1.1 -3.771,-1.129 -3.773,-1.157 -3.777,-1.186 -3.782,-1.214 -3.789,-1.242 -3.797,-1.27 -3.807,-1.297 -3.818,-1.324 -3.83,-1.35 -3.844,-1.375 -3.859,-1.4 -3.875,-1.423 -3.893,-1.446 -3.911,-1.468 -3.931,-1.489 -3.952,-1.509 -3.974,-1.527 -3.997,-1.545 -4.02,-1.561 -4.045,-1.576 -4.07,-1.59 -4.096,-1.602 -4.123,-1.613 -4.15,-1.623 -4.178,-1.631 -4.206,-1.638 -4.234,-1.643 -4.263,-1.647 -4.291,-1.649 -4.32,-1.65 -4.349,-1.649 -4.377,-1.647 -4.406,-1.643 -4.434,-1.638 -4.462,-1.631 -4.49,-1.623 -4.517,-1.613 -4.544,-1.602 -4.57,-1.59 -4.595,-1.576 -4.62,-1.561 -4.643,-1.545 -4.666,-1.527 -4.688,-1.509 -4.709,-1.489 -4.729,-1.468 -4.747,-1.446 -4.765,-1.423 -4.781,-1.4 -4.796,-1.375 -4.81,-1.35 -4.822,-1.324 -4.833,-1.297 -4.843,-1.27 -4.851,-1.242 -4.858,-1.214 -4.863,-1.186 -4.867,-1.157 -4.869,-1.129 -4.87,-1.1 -4.87,-0.5 -4.869,-0.471 -4.867,-0.443 -4.863,-0.414 -4.858,-0.386 -4.851,-0.358 -4.843,-0.33 -4.833,-0.303 -4.822,-0.276 -4.81,-0.25 -4.796,-0.225 -4.781,-0.2 -4.765,-0.177 -4.747,-0.154 -4.729,-0.132 -4.709,-0.111 -4.688,-0.091 -4.666,-0.073 -4.643,-0.055 -4.62,-0.039 -4.595,-0.024 -4.57,-0.01 -4.544,0.002 -4.517,0.013 -4.49,0.023 -4.462,0.031 -4.434,0.038 -4.406,0.043 -4.377,0.047 -4.349,0.049 -4.32,0.05
  Bottom Layer region: 4.349,3.849 4.377,3.847 4.406,3.843 4.434,3.838 4.462,3.831 4.49,3.823 4.517,3.813 4.544,3.802 4.57,3.79 4.595,3.776 4.62,3.761 4.643,3.745 4.666,3.727 4.688,3.709 4.709,3.689 4.729,3.668 4.747,3.646 4.765,3.623 4.781,3.6 4.796,3.575 4.81,3.55 4.822,3.524 4.833,3.497 4.843,3.47 4.851,3.442 4.858,3.414 4.863,3.386 4.867,3.357 4.869,3.329 4.87,3.3 4.87,2.7 4.869,2.671 4.867,2.643 4.863,2.614 4.858,2.586 4.851,2.558 4.843,2.53 4.833,2.503 4.822,2.476 4.81,2.45 4.796,2.425 4.781,2.4 4.765,2.377 4.747,2.354 4.729,2.332 4.709,2.311 4.688,2.291 4.666,2.273 4.643,2.255 4.62,2.239 4.595,2.224 4.57,2.21 4.544,2.198 4.517,2.187 4.49,2.177 4.462,2.169 4.434,2.162 4.406,2.157 4.377,2.153 4.349,2.151 4.32,2.15 4.291,2.151 4.263,2.153 4.234,2.157 4.206,2.162 4.178,2.169 4.15,2.177 4.123,2.187 4.096,2.198 4.07,2.21 4.045,2.224 4.02,2.239 3.997,2.255 3.974,2.273 3.952,2.291 3.931,2.311 3.911,2.332 3.893,2.354 3.875,2.377 3.859,2.4 3.844,2.425 3.83,2.45 3.818,2.476 3.807,2.503 3.797,2.53 3.789,2.558 3.782,2.586 3.777,2.614 3.773,2.643 3.771,2.671 3.77,2.7 3.77,3.3 3.771,3.329 3.773,3.357 3.777,3.386 3.782,3.414 3.789,3.442 3.797,3.47 3.807,3.497 3.818,3.524 3.83,3.55 3.844,3.575 3.859,3.6 3.875,3.623 3.893,3.646 3.911,3.668 3.931,3.689 3.952,3.709 3.974,3.727 3.997,3.745 4.02,3.761 4.045,3.776 4.07,3.79 4.096,3.802 4.123,3.813 4.15,3.823 4.178,3.831 4.206,3.838 4.234,3.843 4.263,3.847 4.291,3.849 4.32,3.85
  Bottom Layer region: 4.349,0.049 4.377,0.047 4.406,0.043 4.434,0.038 4.462,0.031 4.49,0.023 4.517,0.013 4.544,0.002 4.57,-0.01 4.595,-0.024 4.62,-0.039 4.643,-0.055 4.666,-0.073 4.688,-0.091 4.709,-0.111 4.729,-0.132 4.747,-0.154 4.765,-0.177 4.781,-0.2 4.796,-0.225 4.81,-0.25 4.822,-0.276 4.833,-0.303 4.843,-0.33 4.851,-0.358 4.858,-0.386 4.863,-0.414 4.867,-0.443 4.869,-0.471 4.87,-0.5 4.87,-1.1 4.869,-1.129 4.867,-1.157 4.863,-1.186 4.858,-1.214 4.851,-1.242 4.843,-1.27 4.833,-1.297 4.822,-1.324 4.81,-1.35 4.796,-1.375 4.781,-1.4 4.765,-1.423 4.747,-1.446 4.729,-1.468 4.709,-1.489 4.688,-1.509 4.666,-1.527 4.643,-1.545 4.62,-1.561 4.595,-1.576 4.57,-1.59 4.544,-1.602 4.517,-1.613 4.49,-1.623 4.462,-1.631 4.434,-1.638 4.406,-1.643 4.377,-1.647 4.349,-1.649 4.32,-1.65 4.291,-1.649 4.263,-1.647 4.234,-1.643 4.206,-1.638 4.178,-1.631 4.15,-1.623 4.123,-1.613 4.096,-1.602 4.07,-1.59 4.045,-1.576 4.02,-1.561 3.997,-1.545 3.974,-1.527 3.952,-1.509 3.931,-1.489 3.911,-1.468 3.893,-1.446 3.875,-1.423 3.859,-1.4 3.844,-1.375 3.83,-1.35 3.818,-1.324 3.807,-1.297 3.797,-1.27 3.789,-1.242 3.782,-1.214 3.777,-1.186 3.773,-1.157 3.771,-1.129 3.77,-1.1 3.77,-0.5 3.771,-0.471 3.773,-0.443 3.777,-0.414 3.782,-0.386 3.789,-0.358 3.797,-0.33 3.807,-0.303 3.818,-0.276 3.83,-0.25 3.844,-0.225 3.859,-0.2 3.875,-0.177 3.893,-0.154 3.911,-0.132 3.931,-0.111 3.952,-0.091 3.974,-0.073 3.997,-0.055 4.02,-0.039 4.045,-0.024 4.07,-0.01 4.096,0.002 4.123,0.013 4.15,0.023 4.178,0.031 4.206,0.038 4.234,0.043 4.263,0.047 4.291,0.049 4.32,0.05
  Bottom Layer region: -4.291,0.049 -4.263,0.047 -4.234,0.043 -4.206,0.038 -4.178,0.031 -4.15,0.023 -4.123,0.013 -4.096,0.002 -4.07,-0.01 -4.045,-0.024 -4.02,-0.039 -3.997,-0.055 -3.974,-0.073 -3.952,-0.091 -3.931,-0.111 -3.911,-0.132 -3.893,-0.154 -3.875,-0.177 -3.859,-0.2 -3.844,-0.225 -3.83,-0.25 -3.818,-0.276 -3.807,-0.303 -3.797,-0.33 -3.789,-0.358 -3.782,-0.386 -3.777,-0.414 -3.773,-0.443 -3.771,-0.471 -3.77,-0.5 -3.77,-1.1 -3.771,-1.129 -3.773,-1.157 -3.777,-1.186 -3.782,-1.214 -3.789,-1.242 -3.797,-1.27 -3.807,-1.297 -3.818,-1.324 -3.83,-1.35 -3.844,-1.375 -3.859,-1.4 -3.875,-1.423 -3.893,-1.446 -3.911,-1.468 -3.931,-1.489 -3.952,-1.509 -3.974,-1.527 -3.997,-1.545 -4.02,-1.561 -4.045,-1.576 -4.07,-1.59 -4.096,-1.602 -4.123,-1.613 -4.15,-1.623 -4.178,-1.631 -4.206,-1.638 -4.234,-1.643 -4.263,-1.647 -4.291,-1.649 -4.32,-1.65 -4.349,-1.649 -4.377,-1.647 -4.406,-1.643 -4.434,-1.638 -4.462,-1.631 -4.49,-1.623 -4.517,-1.613 -4.544,-1.602 -4.57,-1.59 -4.595,-1.576 -4.62,-1.561 -4.643,-1.545 -4.666,-1.527 -4.688,-1.509 -4.709,-1.489 -4.729,-1.468 -4.747,-1.446 -4.765,-1.423 -4.781,-1.4 -4.796,-1.375 -4.81,-1.35 -4.822,-1.324 -4.833,-1.297 -4.843,-1.27 -4.851,-1.242 -4.858,-1.214 -4.863,-1.186 -4.867,-1.157 -4.869,-1.129 -4.87,-1.1 -4.87,-0.5 -4.869,-0.471 -4.867,-0.443 -4.863,-0.414 -4.858,-0.386 -4.851,-0.358 -4.843,-0.33 -4.833,-0.303 -4.822,-0.276 -4.81,-0.25 -4.796,-0.225 -4.781,-0.2 -4.765,-0.177 -4.747,-0.154 -4.729,-0.132 -4.709,-0.111 -4.688,-0.091 -4.666,-0.073 -4.643,-0.055 -4.62,-0.039 -4.595,-0.024 -4.57,-0.01 -4.544,0.002 -4.517,0.013 -4.49,0.023 -4.462,0.031 -4.434,0.038 -4.406,0.043 -4.377,0.047 -4.349,0.049 -4.32,0.05
  Bottom Layer region: -4.291,3.849 -4.263,3.847 -4.234,3.843 -4.206,3.838 -4.178,3.831 -4.15,3.823 -4.123,3.813 -4.096,3.802 -4.07,3.79 -4.045,3.776 -4.02,3.761 -3.997,3.745 -3.974,3.727 -3.952,3.709 -3.931,3.689 -3.911,3.668 -3.893,3.646 -3.875,3.623 -3.859,3.6 -3.844,3.575 -3.83,3.55 -3.818,3.524 -3.807,3.497 -3.797,3.47 -3.789,3.442 -3.782,3.414 -3.777,3.386 -3.773,3.357 -3.771,3.329 -3.77,3.3 -3.77,2.7 -3.771,2.671 -3.773,2.643 -3.777,2.614 -3.782,2.586 -3.789,2.558 -3.797,2.53 -3.807,2.503 -3.818,2.476 -3.83,2.45 -3.844,2.425 -3.859,2.4 -3.875,2.377 -3.893,2.354 -3.911,2.332 -3.931,2.311 -3.952,2.291 -3.974,2.273 -3.997,2.255 -4.02,2.239 -4.045,2.224 -4.07,2.21 -4.096,2.198 -4.123,2.187 -4.15,2.177 -4.178,2.169 -4.206,2.162 -4.234,2.157 -4.263,2.153 -4.291,2.151 -4.32,2.15 -4.349,2.151 -4.377,2.153 -4.406,2.157 -4.434,2.162 -4.462,2.169 -4.49,2.177 -4.517,2.187 -4.544,2.198 -4.57,2.21 -4.595,2.224 -4.62,2.239 -4.643,2.255 -4.666,2.273 -4.688,2.291 -4.709,2.311 -4.729,2.332 -4.747,2.354 -4.765,2.377 -4.781,2.4 -4.796,2.425 -4.81,2.45 -4.822,2.476 -4.833,2.503 -4.843,2.53 -4.851,2.558 -4.858,2.586 -4.863,2.614 -4.867,2.643 -4.869,2.671 -4.87,2.7 -4.87,3.3 -4.869,3.329 -4.867,3.357 -4.863,3.386 -4.858,3.414 -4.851,3.442 -4.843,3.47 -4.833,3.497 -4.822,3.524 -4.81,3.55 -4.796,3.575 -4.781,3.6 -4.765,3.623 -4.747,3.646 -4.729,3.668 -4.709,3.689 -4.688,3.709 -4.666,3.727 -4.643,3.745 -4.62,3.761 -4.595,3.776 -4.57,3.79 -4.544,3.802 -4.517,3.813 -4.49,3.823 -4.462,3.831 -4.434,3.838 -4.406,3.843 -4.377,3.847 -4.349,3.849 -4.32,3.85
  silkscreen extent -4.47,-3.4 4.47,-2.25
IMM0505S05 [mm]
  rect 1.303x1.303 hole 0.76: 1(0,0)
  round 1.303 hole 0.76: 2(2.54,0) 3(5.08,0) 8(17.78,0) 9(20.32,0)
  silkscreen extent -2.4,-7.62 24.2,1.7, body extent -1.8,-7.6 24.2,1.7, height 13.1
J110-ND [mm]
  round 1.72 hole 1.32: 1(0,0) 1(10.16,0)
  silkscreen extent 0,-2 10.16,2
JHM1005S05 [mm]
  round 1.2 hole 0.7: 2(0,0) 3(-2.54,0) 10(-20.32,0) 14(-22.86,-15.24) 16(-17.78,-15.24) 22(-2.54,-15.24) 23(0,-15.24)
  silkscreen extent -27.43,-17.82 4.32,3.2, body extent -27.28,-17.7 4.52,2.6, height 13.41
LED_SML-M13DT_ROM [mil]
  rect 20x35 smd paste+0 mask+0: 1(-29.5,0) 2(29.5,0)
  Top Layer keep-out region: -17.5,-22.5 -17.5,22.5 17.5,22.5 17.5,-22.5
  silkscreen extent -130,-30 14,30
POT_PV36W_MUR [mil]
  rect 54x54 hole 34 paste-99999 mask+0: 1(0,0)
  round 54 hole 34 paste-99999 mask+0: 2(98.43,0) 3(196.85,0)
  silkscreen extent -96,-153 292,104, body extent -79,-98 299,99, height 377
PW14 [mil]
  rect 66x14 smd paste-33 mask-33: 1(-111,76.77) 2(-111,51.18) 3(-111,25.59) 4(-111,0) 5(-111,-25.59) 6(-111,-51.18) 7(-111,-76.77) 8(111,-76.77) 9(111,-51.18) 10(111,-25.59) 11(111,0) 12(111,25.59) 13(111,51.18) 14(111,76.77)
  silkscreen extent -89,-101 164,101, body extent -130,-101 130,101, height 47
R_8_ADI [mil]
  rect 78x22 smd paste+0 mask+0: 1(-97,75) 2(-97,25) 3(-97,-25) 4(-97,-75) 5(97,-75) 6(97,-25) 7(97,25) 8(97,75)
  silkscreen extent -84,-104 84,104, body extent -122,-99 122,99, height 69
RESISTOR_0805-M [mil]
  rect 36x55 smd paste+0 mask+0: 1(-37.5,0) 2(37.5,0)
  Top Layer keep-out region: -17.5,27.5 -17.5,-27.5 17.5,-27.5 17.5,27.5
  silkscreen extent -7,-32 7,32, body extent -44,-26 44,26, height 26
Resistor_0805-M [mil]
  rect 36x55 smd paste+0 mask+0: 1(-37.5,0) 2(37.5,0)
  silkscreen extent -7,-32 7,32, body extent -44,-26 44,26, height 26
RJ_5_ADI [mil]
  rect 50x20 smd paste+0 mask+0: 1(-48,37.4) 2(-48,0) 3(-48,-37.4) 4(48,-37.4) 5(48,37.4)
  silkscreen extent -39,-64 39,64, body extent -59,-59 59,59, height 57
RU_16_ADI [mil]
  rect 58x14 smd paste+0 mask+0: 1(-111,89.57) 2(-111,63.98) 3(-111,38.39) 4(-111,12.8) 5(-111,-12.8) 6(-111,-38.39) 7(-111,-63.98) 8(-111,-89.57) 9(111,-89.57) 10(111,-63.98) 11(111,-38.39) 12(111,-12.8) 13(111,12.8) 14(111,38.39) 15(111,63.98) 16(111,89.57)
  silkscreen extent -72,-106 160,106, body extent -126,-101 126,101, height 47
SO-8_STM [mil]
  rect 61x22 smd paste-30.5 mask-30.5: 1(-105.5,75) 2(-105.5,25) 3(-105.5,-25) 4(-105.5,-75) 5(105.5,-75) 6(105.5,-25) 7(105.5,25) 8(105.5,75)
  silkscreen extent -71,-98 71,98, body extent -122,-99 122,99, height 69
SOP65P490X110-8N [mm]
  rrect25% 1.47x0.48 smd paste+0 mask+0.102: 1(-2.15,0.975) 2(-2.15,0.325) 3(-2.15,-0.325) 4(-2.15,-0.975) 5(2.15,-0.975) 6(2.15,-0.325) 7(2.15,0.325) 8(2.15,0.975)
  silkscreen extent -3.62,-1.54 1.5,1.54, body extent -2.45,-1.5 2.45,1.5, height 1.1
SOT-23_ONS [mil]
  rect 22x56 smd paste+0 mask+0: 1(-37.5,-38) 2(37.5,-38) 3(0,38)
  silkscreen extent -115,-57 65,32, body extent -60,-52 60,52, height 44
SWITCH_03211B [mil]
  round 67 hole 47 paste-99999 mask+0: 1(0,0) 6(0,-208.66)
  silkscreen extent -583,-345 -23,137
Testpoint1 [mil]
  round 60 hole 40: 1(0,0)
WCAP-ASLL_4X5.5(DXL) [mm]
  rect 2.6x1.6 smd: 1(1.8,0) 2(-1.8,0)
  silkscreen extent -2.25,-2.25 2.25,2.25